# EAGLE board dc-motor-driver (EAGLE 4.16)
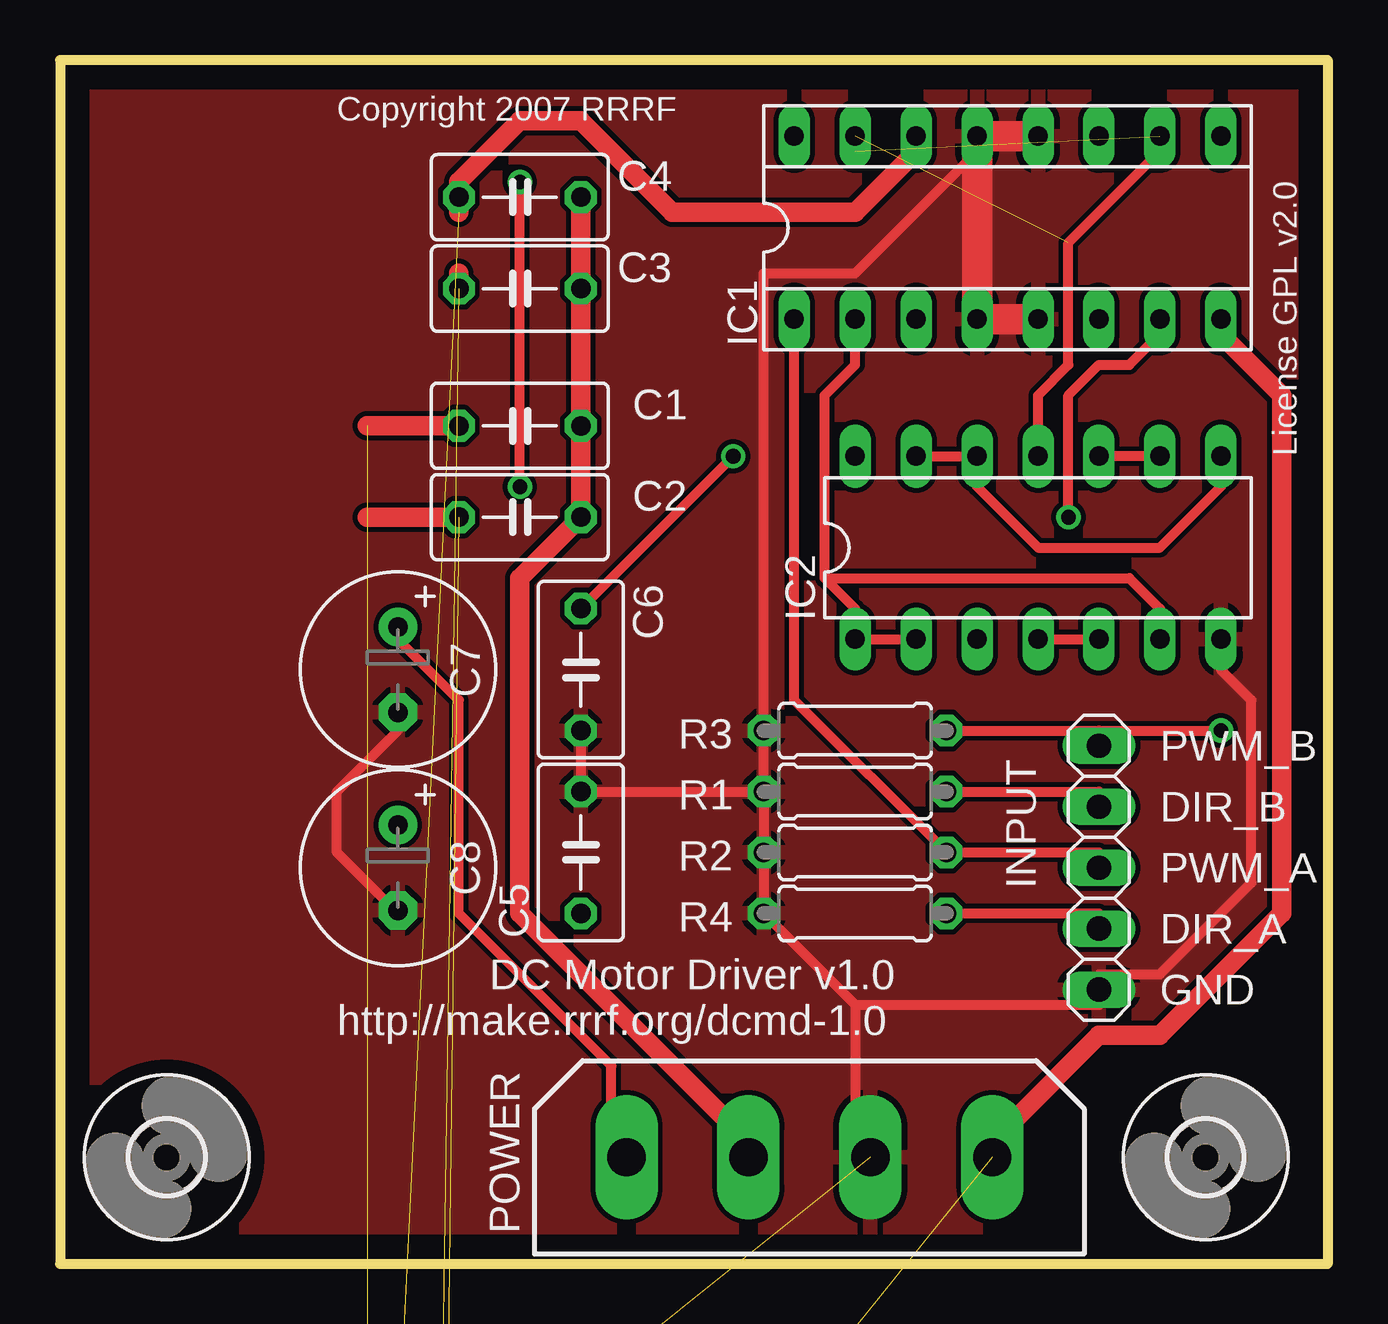
[diagram p0: board, top side]
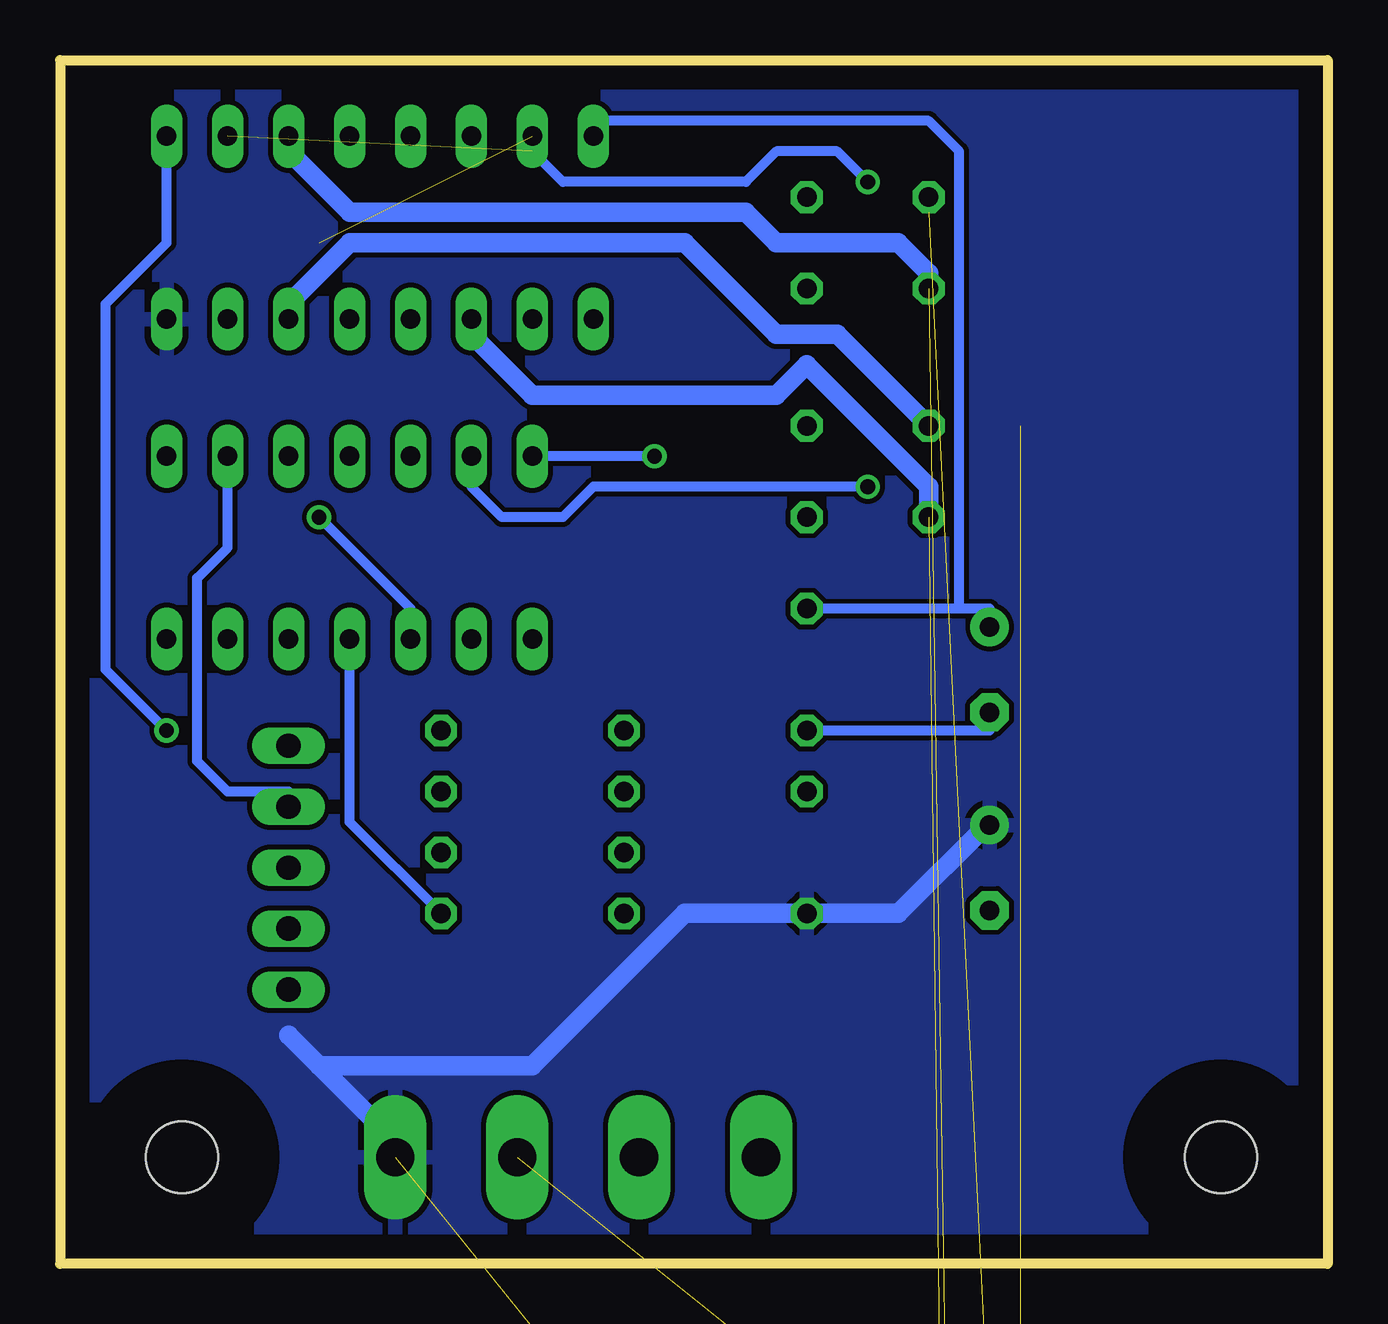
[diagram p1: board, bottom side, seen from below]

Size 52.82 x 50.16 mm. Coordinates in mm from the lower left corner, seen from the top.
Outline: 52.82,50.16 0,50.16 0,0 52.82,0 52.82,50.16
Copper layers (1*16): Top 0.035mm / dielectric 1.5mm / Bottom 0.035mm
Design rules "default": minimum track width 10mil, minimum drill 24mil, track to track 8mil, track to pad 8mil, pad to pad 8mil, via to via 8mil, smd to smd 8mil, copper to edge 40mil, drill to drill 8mil, minimum pad ring 10mil, minimum via ring 8mil, stop-mask expansion 4mil, vias tented up to drill 0mil, thermal gap 10mil
Net classes: 0 default: width 0.406 mm, drill 0.381 mm; 1 power: width 0.813 mm, drill 0.381 mm

## Footprints (pad centres in the part's own frame; a part is rotated, then mirrored left to right if it is on the bottom)
C050-035X075 = drill 0.813 octagon: 1 -2.54,0; 2 2.54,0
E3,5-8 = drill 0.813 pad 1.6 round: + -1.778,0 | drill 0.813 pad 1.6 octagon: - 1.778,0
3,0 = hole 3: 0,0
SOCKED-16 = drill 0.813 long: 1 -8.89,-3.81; 2 -6.35,-3.81; 3 -3.81,-3.81; 4 -1.27,-3.81; 5 1.27,-3.81; 6 3.81,-3.81; 7 6.35,-3.81; 8 8.89,-3.81; 9 8.89,3.81; 10 6.35,3.81; 11 3.81,3.81; 12 1.27,3.81; 13 -1.27,3.81; 14 -3.81,3.81; 15 -6.35,3.81; 16 -8.89,3.81
DIL14 = drill 0.813 long: 1 -7.62,-3.81; 2 -5.08,-3.81; 3 -2.54,-3.81; 4 0,-3.81; 5 2.54,-3.81; 6 5.08,-3.81; 7 7.62,-3.81; 8 7.62,3.81; 9 5.08,3.81; 10 2.54,3.81; 11 0,3.81; 12 -2.54,3.81; 13 -5.08,3.81; 14 -7.62,3.81
1X05 = drill 1.016 long: 1 -5.08,0; 2 -2.54,0; 3 0,0; 4 2.54,0; 5 5.08,0
LED5MM = drill 0.813 octagon: A -1.27,0; K 1.27,0
9090-4V = drill 1.6 pad 2.6 long: 1 -7.62,0; 2 -2.54,0; 3 2.54,0; 4 7.62,0
0207/7 = drill 0.813 octagon: 1 -3.81,0; 2 3.81,0
MSTBV2 = drill 1.397 long: 1 -2.54,0; 2 2.54,0

## Placement (x,y rotation side)
C1  100nF  [C050-035X075]  19.16,34.92 0 top
C2  100nF  [C050-035X075]  19.16,31.11 0 top
C3  100nF  [C050-035X075]  19.16,40.64 0 top
C4  100nF  [C050-035X075]  19.16,44.45 0 top
C5  100nF  [C050-035X075]  21.7,17.14 90 top
C6  100nF  [C050-035X075]  21.7,24.77 270 top
C7  100uF  [E3,5-8]  14.08,24.77 270 top
C8  100uF  [E3,5-8]  14.08,16.51 270 top
H1  MOUNT-HOLE3.0  [3,0]  4.45,4.45 0 top
H2  MOUNT-HOLE3.0  [3,0]  47.73,4.45 0 top
H3  MOUNT-HOLE3.0  [3,0]  2.65,-81.92 0 top  (outside the outline)
H4  MOUNT-HOLE3.0  [3,0]  -7.51,-81.92 0 top  (outside the outline)
IC1  L293D  [SOCKED-16]  39.48,43.18 0 top
IC2  74HC00N  [DIL14]  40.75,29.84 0 top
INPUT  [1X05]  43.29,16.51 90 top
LED1  [LED5MM]  16.62,-8.26 0 top  (outside the outline)
LED2  [LED5MM]  16.62,-43.82 0 top  (outside the outline)
LED3  [LED5MM]  16.62,-56.52 0 top  (outside the outline)
LED4  [LED5MM]  16.62,-69.22 0 top  (outside the outline)
LED5  [LED5MM]  16.62,-81.92 0 top  (outside the outline)
POWER  9090-4V  [9090-4V]  31.23,4.45 0 top
R1  100K  [0207/7]  33.13,19.68 180 top
R2  100K  [0207/7]  33.13,17.14 180 top
R3  100K  [0207/7]  33.13,22.22 180 top
R4  100K  [0207/7]  33.13,14.6 180 top
R5  560  [0207/7]  16.62,-18.41 0 top  (outside the outline)
R6  560  [0207/7]  16.62,-26.04 0 top  (outside the outline)
R7  560  [0207/7]  16.62,-33.65 0 top  (outside the outline)
X2  MST2V  [MSTBV2]  -4.97,-104.78 0 top  (outside the outline)
X3  MST2V  [MSTBV2]  -4.97,-116.21 0 top  (outside the outline)

## Library data of the parts
C1-C8 R1-R7 = rcl
H1-H4 = holes
IC1 = ic-package
IC2 = 74xx-eu
INPUT = pinhead
LED1-LED5 = led
POWER = con-thomas-betts
X2 X3 = con-phoenix-508

## Nets
DIR_A: IC2.4 IC2.5 INPUT.2 R4.1
DIR_B: IC2.9 IC2.10 INPUT.4 R1.1
GND: C5.2 C6.2 C7.- C8.- IC1.4 IC1.5 IC1.12 IC1.13 IC2.7 INPUT.1 LED1.K POWER.3 R1.2 R2.2 R3.2 R4.2
GNDA [power]: C1.2 C2.2 C3.2 C4.2 POWER.2
N$1: IC1.7 IC2.3
N$2: IC1.2 IC2.1 IC2.2 IC2.6
N$3: IC1.15 IC2.11
N$4: IC1.10 IC2.8 IC2.12 IC2.13
N$5: LED1.A R5.1
N$6: LED2.K LED3.A R7.2
N$8: LED4.K LED5.A R6.2
OUTA_1 [power]: C2.1 IC1.3 LED4.A LED5.K X2.1
OUTA_2 [power]: C1.1 IC1.6 R6.1 X2.2
OUTB_1 [power]: C3.1 IC1.11 LED2.A LED3.K X3.1
OUTB_2 [power]: C4.1 IC1.14 R7.1 X3.2
PWM_A: IC1.1 INPUT.3 R2.1
PWM_B: IC1.9 INPUT.5 R3.1
VCC: C6.1 C7.+ IC1.16 IC2.14 POWER.1
VSS [power]: C5.1 C8.+ IC1.8 POWER.4 R5.2

## Tracks (layer width: path | path; a pad name or v marks a point on that pad's centre or on a via)
DIR_A
  Top 0.406: IC2.4 IC2.5 | R4.1 43.29,14.6 INPUT.2
  Bottom 0.406: R4.1 40.75,18.41 IC2.4
DIR_B
  Top 0.406: IC2.9 IC2.10 | R1.1 43.29,19.68 INPUT.4
  Bottom 0.406: IC2.9 45.83,29.84 47.1,28.57 47.1,20.95 45.83,19.68 43.29,19.68 INPUT.4
GND  (1 unrouted)
  Top 0.406: IC2.7 48.37,24.77 49.64,23.49 49.64,15.88 45.83,12.06 43.29,12.06 INPUT.1 43.29,10.8 33.13,10.8 | C8.- 14.08,14.6 11.54,17.14 11.54,19.68 14.08,22.22 C7.- | R1.2 R3.2 29.32,41.27 33.13,41.27 38.21,46.35 | R1.2 C5.2 C6.2 | R1.2 R2.2 R4.2 33.13,10.8 | 33.13,10.8 33.13,5.71 POWER.3
  Top 1.27: IC1.12 IC1.13 38.21,46.35 IC1.4 IC1.5
  Bottom 0.406: C6.2 14.08,22.22 C7.-
  pour Top: 52.18,49.53 0.63,49.53 0.63,0.63 52.18,0.63
GNDA
  Top 0.813: C4.2 C3.2 C1.2 C2.2 19.16,28.57 19.16,14.6 28.05,5.71 POWER.2
N$1  (via drill 0.61)
  Top 0.406: v42.02,31.11 42.02,36.2 43.29,37.47 44.56,37.47 45.83,38.73 IC1.7
  Bottom 0.406: v42.02,31.11 38.21,27.3 IC2.3
N$2
  Top 0.406: IC2.2 IC2.1 33.13,27.3 31.86,28.57 | 31.86,28.57 31.86,36.2 33.13,37.47 IC1.2 | 31.86,28.57 44.56,28.57 45.83,27.3 IC2.6
N$3  (1 unrouted)
  Top 0.406: 45.83,46.35 42.02,42.55 42.02,37.47 40.75,36.2 IC2.11
N$4  (via drill 0.61)  (1 unrouted)
  Top 0.406: IC2.13 IC2.12 38.21,32.38 40.75,29.84 45.83,29.84 48.37,32.38 IC2.8 | v19.16,32.38 v19.16,45.09
  Bottom 0.406: 33.13,46.35 31.86,45.09 24.24,45.09 22.97,46.35 20.43,46.35 v19.16,45.09 | v19.16,32.38 30.59,32.38 31.86,31.11 34.4,31.11 35.67,32.38 IC2.13
N$5  (1 unrouted)
N$6  (2 unrouted)
N$8  (2 unrouted)
OUTA_1  (3 unrouted)
  Top 0.813: 12.81,31.11 C2.1
  Bottom 0.813: C2.1 16.62,32.38 21.7,37.47 22.97,36.2 33.13,36.2 35.67,38.73 IC1.3
OUTA_2  (2 unrouted)
  Top 0.813: 12.81,34.92 C1.1
  Bottom 0.813: C1.1 20.43,38.73 22.97,38.73 26.78,42.55 40.75,42.55 43.29,40 IC1.6
OUTB_1  (3 unrouted)
  Top 0.813: C3.1 16.62,41.27
  Bottom 0.813: IC1.11 43.29,46.35 40.75,43.81 24.24,43.81 22.97,42.55 17.89,42.55 16.62,41.27 C3.1
OUTB_2  (2 unrouted)
  Top 0.813: 16.62,43.81 C4.1 16.62,45.09 19.16,47.62 21.7,47.62 25.51,43.81 33.13,43.81 35.67,46.35 IC1.14
PWM_A
  Top 0.406: INPUT.3 43.29,17.14 R2.1 30.59,23.49 IC1.1
PWM_B  (via drill 0.61)
  Top 0.406: R3.1 43.29,22.22 | 43.29,22.22 v48.37,22.22 | 43.29,22.22 INPUT.5
  Bottom 0.406: v48.37,22.22 50.91,24.77 50.91,40 48.37,42.55 IC1.9
VCC  (via drill 0.61)
  Top 0.406: C6.1 v28.05,33.66 | POWER.1 22.97,5.71 22.97,8.26 16.62,14.6 16.62,23.49 14.08,26.04 C7.+
  Bottom 0.406: 15.35,27.3 14.08,27.3 C7.+ | 15.35,27.3 C6.1 | v28.05,33.66 IC2.14 | 15.35,27.3 15.35,46.35 16.62,47.62 30.59,47.62 IC1.16
VSS  (1 unrouted)
  Top 0.813: IC1.8 48.37,38.73 50.91,36.2 50.91,14.6 45.83,9.52 43.29,9.52 39.48,5.71 POWER.4
  Bottom 0.813: C8.+ 14.08,18.41 17.89,14.6 C5.1 26.78,14.6 33.13,8.26 42.02,8.26 | 42.02,8.26 39.48,5.71 POWER.4 | 42.02,8.26 43.29,9.52
  pour Bottom: 52.18,0.63 52.18,49.53 0.63,49.53 0.63,0.63

## Text on the board
tPlace: Copyright 2007 RRRF | License GPL v2.0 | PWM_B | DIR_B | PWM_A | DIR_A | DC Motor Driver v1.0 | GND | http://make.rrrf.org/dcmd-1.0